# Altium PCB PDM Mk21.PcbDoc
Units mm, origin at the board's own origin, x right, y up, seen from the top; angles counter-clockwise.
Board outline 34 x 73 mm, 4 copper layers (Top Layer, Ground Layer, Power Layer, Bottom Layer), stack 0.778 mm thick; 37 components, 33 nets, 170 pads, 66 vias.
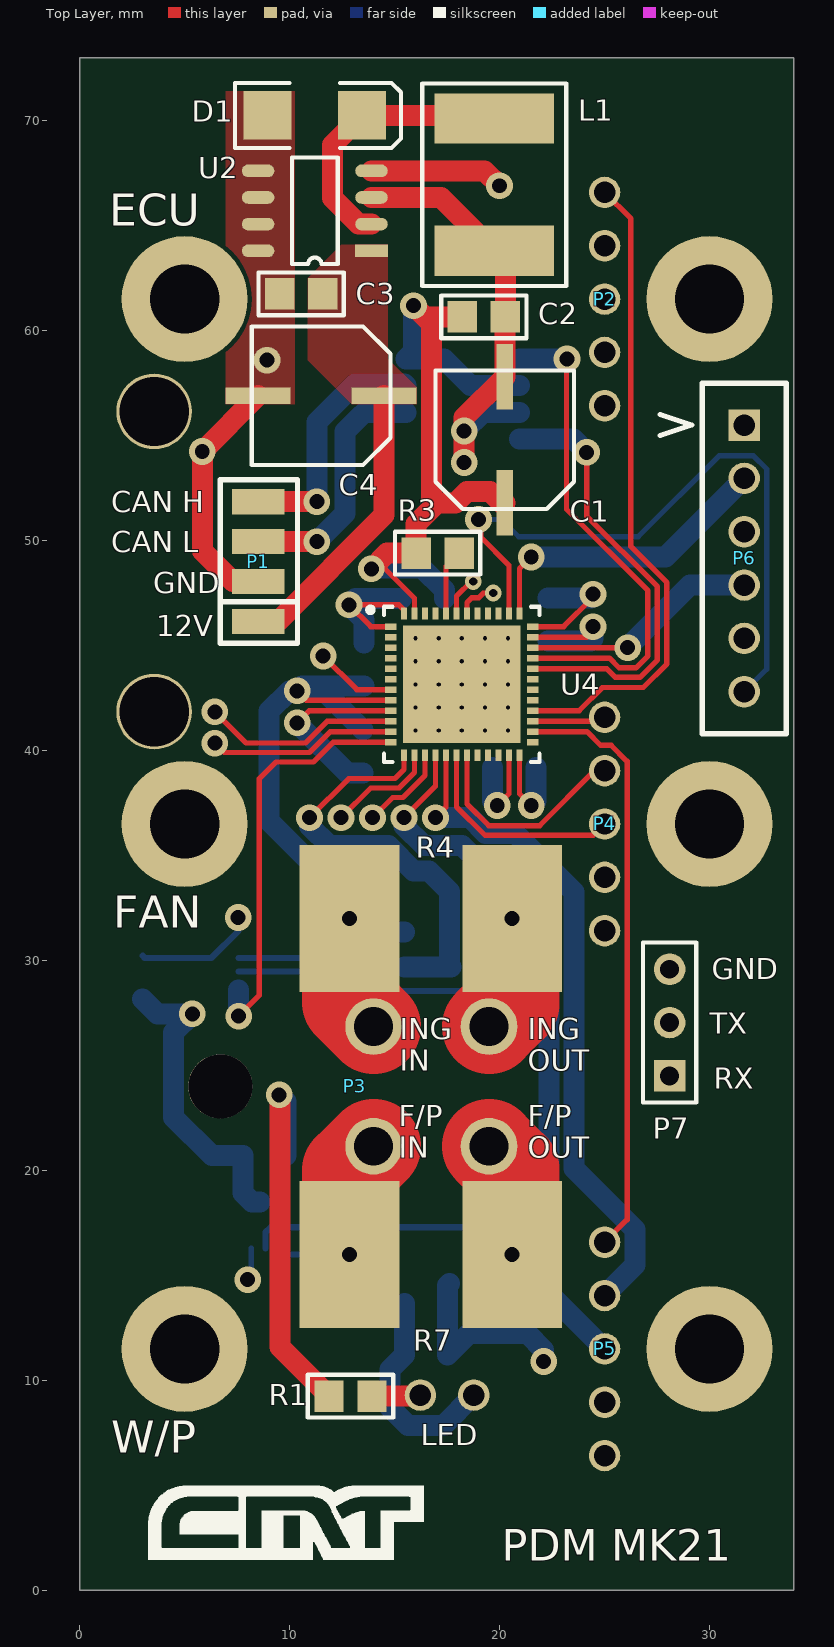
[diagram p0: Top Layer view]
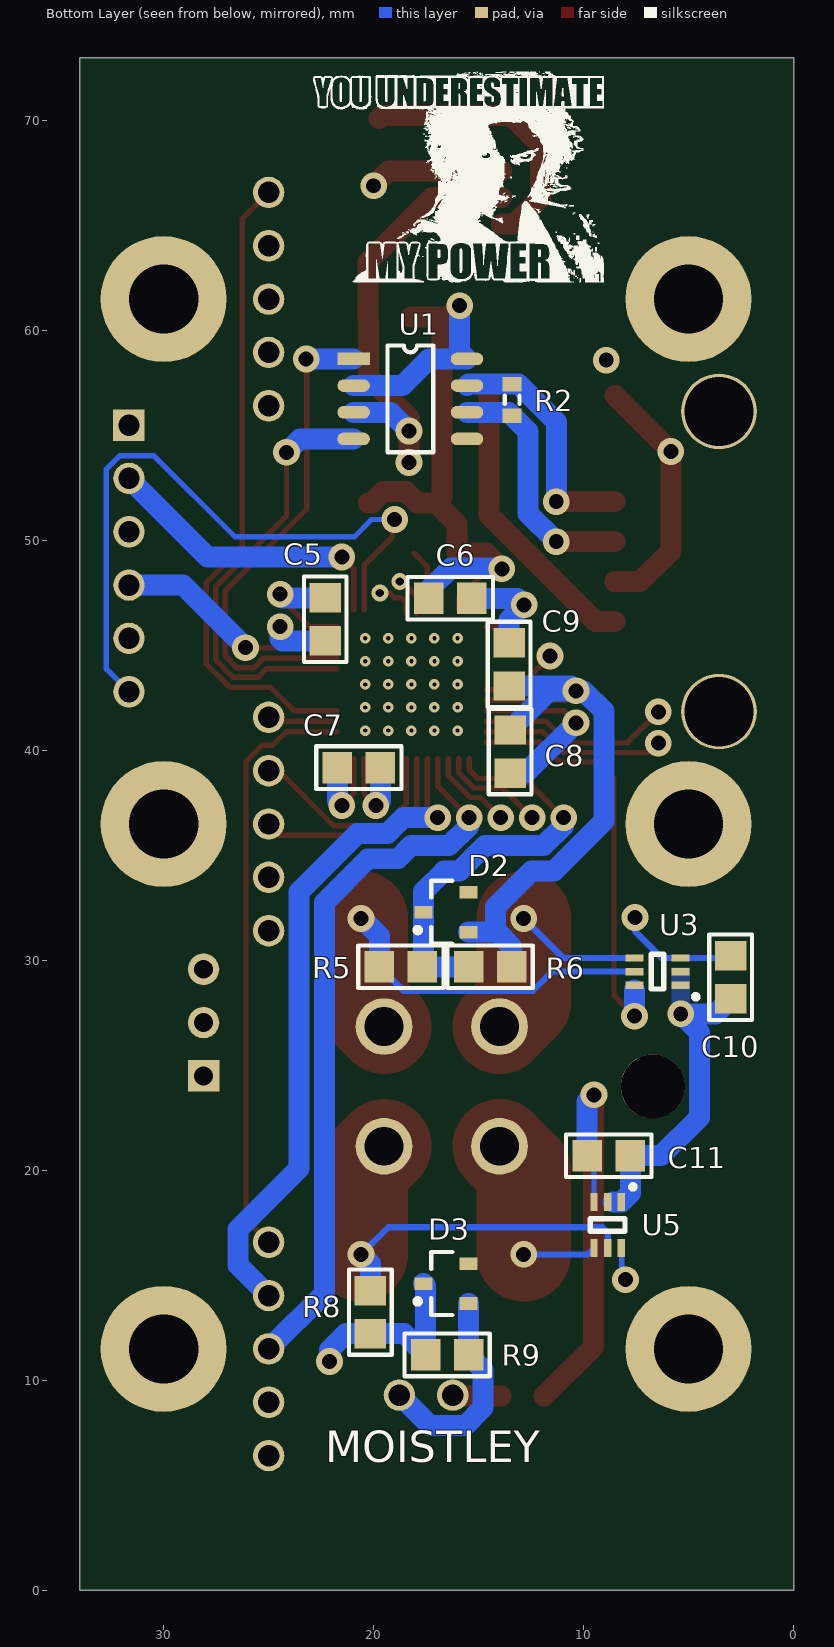
[diagram p1: Bottom Layer view, seen from below]
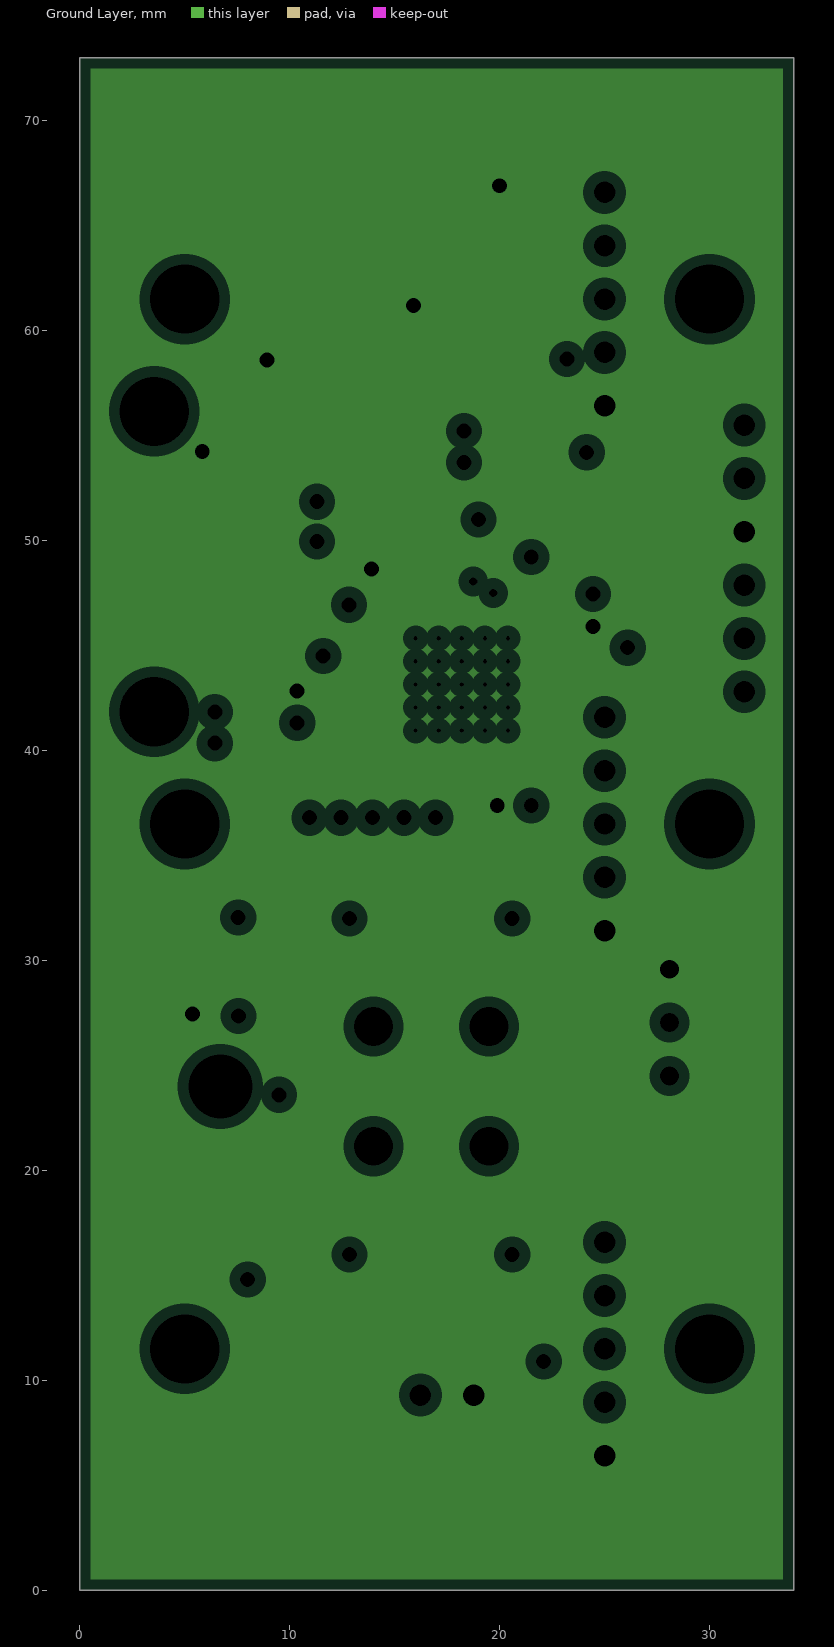
[diagram p2: Ground Layer, clearances drawn from the general rule]
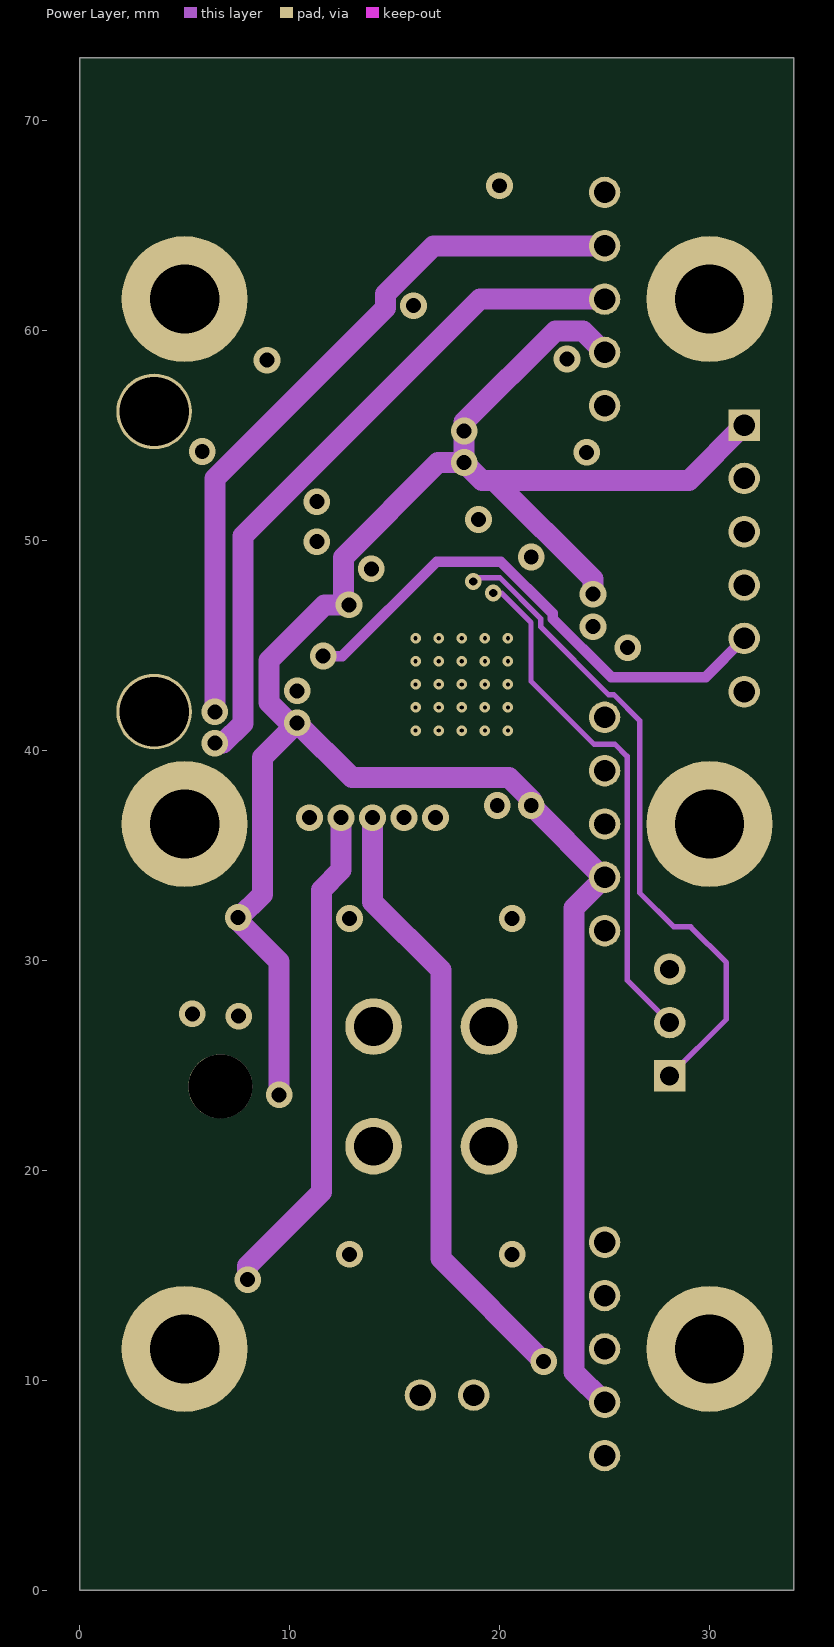
[diagram p3: Power Layer]

## Layer stack, top to bottom
Top Solder: solder mask 0.0102, Solder Resist, Dk 3.5
Top Layer: signal copper 0.0356
Dielectric 1: core 0.254, FR-4, Dk 4.2
Ground Layer: plane copper 0.036, net GND
Dielectric 2: core 0.254, Dk 4.2
Power Layer: signal copper 0.036
Dielectric 3: prepreg 0.127, Dk 4.2
Bottom Layer: signal copper 0.0356
Bottom Solder: solder mask 0.0102, Solder Resist, Dk 3.5

## Board outline
0,0 0,73 34,73 34,0

## Design rules (kind name [scope] priority, off if disabled: settings)
Clearance [All] p1: gap=0.2
ComponentClearance [All] p1: gap=0 collisioncheckmode=3 verticalgap=0 showdistances=FALSE
PlaneClearance [All] p1: clearance=0.508
PlaneConnect [All] p1: planeconnectstyle=Direct reliefexpansion=0.508 reliefentries=4 reliefconductorwidth=0.254 reliefairgap=0.254
PolygonConnect [All] p1: connectstyle=Direct reliefconductorwidth=0.254 reliefentries=4 polygonreliefangle="90 Angle" airgapwidth=0.254
RoutingVias [All] p1: holewidth=0.711 width=1.27 viastyle="Through Hole" minholewidth=0.2 minwidth=0.5 maxholewidth=0.711 maxwidth=1.27
SolderMaskExpansion [All] p1: expansion=0.102
Width [All] p1: maxlimit=4.75 minlimit=0.254 preferedwidth=1.5
27 further rules are at their usual default settings.

## Components (designator, comment, footprint, x,y, rotation, side; value= is the part's Value field where it differs from the comment)
C1 "" "SMD CAPACITOR 220UF 16V" 20.25,54.8 r180 top
C2 "" R0805 19.25,60.65 r0 top
C3 "Cap" R0805 10.55,61.75 r180 top
C4 "" "SMD CAPACITOR 220UF 16V" 11.5,56.9 r270 top
C5 "Cap" R0805 22.3,46.25 r90 bottom
C6 "Cap" R0805 16.35,47.25 r180 bottom
C7 "Cap" R0805 20.7,39.19 r0 bottom
C8 "Cap" R0805 13.5,39.95 r270 bottom
C9 "Cap" R0805 13.55,44.1 r90 bottom
C10 "Cap" R0805 3,29.2 r90 bottom
C11 "Cap" R0805 8.8,20.7 r0 bottom
D1 "D Schottky" Diode 11.2,70.25 r180 top
D2 "3.6v" BZX84CxxxET1G 16.55,32.3 r0 bottom
D3 "3.6v" BZX84CxxxET1G 16.55,14.61 r0 bottom
L1 "47mH" Inductor 19.75,66.95 r90 top
LED "" LED-0 17.5,9.3 r180 top (schematic designator LED1)
P1 "Mega-fit 4 pin connector" "SMD 4Wire" 8.5,49 r0 top
P2 "Board to board 2.5mm jumper pins" "Board-Board Jumper" 25,61.5 r0 top
P3 "Mega-fit 4 pin connector" "Mega-fit 4 pin connector" 6.7,24 r90 top
P4 "Board to board 2.5mm jumper pins" "Board-Board Jumper" 25,36.5 r0 top
P5 "Board to board 2.5mm jumper pins" "Board-Board Jumper" 25,11.5 r0 top
P6 "Programming Pins" "Programming Pins" 31.65,55.5 r0 top
P7 "UART Debug" HDR1X3 28.1,24.5 r90 top
R1 "GND" R0805 12.9,9.25 r0 top
R2 "Res3" J1-0603 13.4,56.7 r90 bottom
R3 "GND" R0805 17.05,49.4 r180 top
R4 "CRS1050 R003" CRS1050 12.85,32 r0 top
R5 "Low Drift" R0805 18.7,29.7 r0 bottom
R6 "Low Drift" R0805 14.45,29.7 r0 bottom
R7 "CRS1050 R003" CRS1050 12.85,16 r0 top
R8 "Low Drift" R0805 20.15,13.25 r90 bottom
R9 "Low Drift" R0805 16.5,11.21 r0 bottom
U1 "CAN Transceiver" "CAN Transceiver" 20.95,58.65 r180 bottom
U2 "DC/DC CONVERTER" "DC/DC Converter" 13.9,63.8 r180 top
U3 "High side current sense amplifier" INA212 5.38,28.82 r90 bottom
U4 "PDM Mk21 MICRO" QFN50P700X700X60_HS-49N 18.2,43.15 r0 top
U5 "High side current sense amplifier" INA212 8.2,18.5 r0 bottom

## Footprints (in the part's own frame and the unit in brackets; to place one, negate y for a bottom-side part, rotate by r counter-clockwise, add the part's x,y. Pads: shape width x height; smd on the part's side, far side on the other; paste and mask are expansions set on the pad)
"Board-Board Jumper" [mm] "Board to board 2.54mm header pins"
  round 1.5 hole 1.02: 1(0,5.08) 2(0,2.54) 3(0,0) 4(0,-2.54) 5(0,-5.08)
BZX84CxxxET1G [mm] "SOT23, 3-Leads, Body 2.9x1.3mm, Pitch 0.95mm, Lead Span 2.3mm - Reverse Pinning, IPC High Density"
  rect 0.85x0.6 smd: 1(-1.075,0.95) 2(1.075,0) 3(-1.075,-0.95)
  silkscreen extent -0.3,-1.5 1.48,1.5, body extent -0.7,-1.5 0.7,1.5, height 1.1
"CAN Transceiver" [mm] "SOP8 Footprint"
  rect 1.55x0.6 smd: 1(0,0)
  oval 1.55x0.6 smd: 2(0,-1.27) 3(0,-2.54) 4(0,-3.81) 5(5.4,-3.81) 6(5.4,-2.54) 7(5.4,-1.27) 8(5.4,0)
  silkscreen extent 1.61,-4.45 3.79,0.63, body extent -0.4,-4.35 5.6,0.55, height 1.62
CRS1050 [mm] "3mOhm current shunt resistor footprint"
  rect 4.75x7 smd: 1(0,0) 2(7.75,0)
  body extent -1.37,-2.5 9.13,2.5, height 0.9
"DC/DC Converter" [mm] "SOP8 footprint"
  rect 1.55x0.6 smd: 1(0,0)
  oval 1.55x0.6 smd: 2(0,-1.27) 3(0,-2.54) 4(0,-3.81) 5(5.4,-3.81) 6(5.4,-2.54) 7(5.4,-1.27) 8(5.4,0)
  silkscreen extent 1.61,-4.44 3.79,0.64, body extent -0.4,-4.35 5.6,0.55, height 1.62
Diode [mm] "DO-214-AA/SMB; 2 C-Bend Leads; Body 5.3 x 3.6 mm, inc. leads (LxW)"
  rect 2.3x2.3 smd: 1(2.25,0) 2(-2.25,0)
  silkscreen extent -4.1,-1.55 3.8,1.55, body extent -2.54,-1.02 2.54,1.02, height 2
HDR1X3 [mm] "Connector; Header; 3 Position"
  rect 1.5x1.5 hole 0.9: 1(0,0)
  round 1.5 hole 0.9: 2(2.54,0) 3(5.08,0)
  silkscreen extent -1.27,-1.27 6.35,1.27
INA212 [mm] "Current Amplifier"
  rect 0.35x0.85 smd: 1(0,0) 2(0.65,0) 3(1.3,0) 4(1.3,2.2) 5(0.65,2.2) 6(0,2.2)
  silkscreen extent -0.65,-0.82 1.48,1.4, body extent -0.42,0.4 1.73,1.8, height 1.1
Inductor [mm]
  rect 2.4x5.7 smd: 1(3.15,0) 2(-3.15,0)
  silkscreen extent -4.83,-3.43 4.83,3.43, body extent -3.15,-3.15 3.15,3.15, height 4.5
J1-0603 [mm] "Chip Resistor, Body 1.6x0.8mm, IPC High Density"
  rect 0.7x0.9 smd: 1(-0.75,0) 2(0.75,0)
  silkscreen extent -0.2,-0.35 0.2,0.35, body extent -0.85,-0.48 0.85,0.48, height 0.9
LED-0 [mm] "LED; 2 Leads"
  round 1.5 hole 1.02: 1(1.27,0) 2(-1.27,0)
"Mega-fit 4 pin connector" [mm] "MOLEX mega-fit 4 pin connector"
  round 3.05 hole 3.05: 0(0,0)
  round 2.7 hole 1.85: 1(2.85,-7.3) 2(2.85,-12.8) 3(-2.85,-12.8) 4(-2.85,-7.3)
  body extent -6.03,-13.36 6.03,8.6, height 15.62
"Programming Pins" [mm] "STM32 Micro Programming Pins"
  rect 1.5x1.5 hole 1.02: 1(0,0)
  round 1.5 hole 1.02: 2(0,-2.54) 3(0,-5.08) 4(0,-7.62) 5(0,-10.16) 6(0,-12.7)
  silkscreen extent -4,-14.7 2,2, body extent -1.27,-13.97 1.27,1.27, height 9.5
QFN50P700X700X60_HS-49N [mm] "QFN, 48-Leads, Body 7.00x7.00mm, Pitch 0.50mm, Thermal Pad 5.80x5.80mm, IPC Medium Density"
  rect 0.55x0.3 smd: 1(-3.375,2.75) 2(-3.375,2.25) 3(-3.375,1.75) 4(-3.375,1.25) 5(-3.375,0.75) 6(-3.375,0.25) 7(-3.375,-0.25) 8(-3.375,-0.75) 9(-3.375,-1.25) 10(-3.375,-1.75) 11(-3.375,-2.25) 12(-3.375,-2.75) 25(3.375,-2.75) 26(3.375,-2.25) 27(3.375,-1.75) 28(3.375,-1.25) 29(3.375,-0.75) 30(3.375,-0.25) 31(3.375,0.25) 32(3.375,0.75) 33(3.375,1.25) 34(3.375,1.75) 35(3.375,2.25) 36(3.375,2.75)
  rect 0.3x0.55 smd: 13(-2.75,-3.375) 14(-2.25,-3.375) 15(-1.75,-3.375) 16(-1.25,-3.375) 17(-0.75,-3.375) 18(-0.25,-3.375) 19(0.25,-3.375) 20(0.75,-3.375) 21(1.25,-3.375) 22(1.75,-3.375) 23(2.25,-3.375) 24(2.75,-3.375) 37(2.75,3.375) 38(2.25,3.375) 39(1.75,3.375) 40(1.25,3.375) 41(0.75,3.375) 42(0.25,3.375) 43(-0.25,3.375) 44(-0.75,3.375) 45(-1.25,3.375) 46(-1.75,3.375) 47(-2.25,3.375) 48(-2.75,3.375)
  rect 5.6x5.6 smd: 49(0,0)
  silkscreen extent -4.47,-3.7 3.7,3.7, body extent -3.55,-3.55 3.55,3.55, height 0.6
R0805 [mm]
  rect 1.4x1.5 smd: 1(-1.025,0) 2(1.025,0)
  silkscreen extent -2.03,-1.02 2.03,1.02, body extent -1.4,-0.76 1.4,0.76, height 1
"SMD 4Wire" [mm]
  rect 2.5x1.2 smd: 1(0,-2.85) 2(0,-0.95) 3(0,0.95) 4(0,2.85)
  silkscreen extent -1.81,-3.89 1.88,3.89
"SMD CAPACITOR 220UF 16V" [mm]
  rect 0.8x3.1 smd: 1(0,3) 2(0,-3)
  silkscreen extent -3.3,-3.3 3.3,3.3, body extent -3,-3 3,3, height 5

## Part data
C1 C2 C4: library part "Cap Semi", "Capacitor (Semiconductor SIM Model)"
C3 C5 C6 C7 C8 C9 C10 C11: "Capacitor"
D1: "Schottky Diode"
D2 D3: library part "D Zener", "Zener Diode"
L1: library part Inductor, "Inductor"
LED: library part LED0, "Typical INFRARED GaAs LED"
P1: "MOLEX mega-fit 4 pin connector"
P2 P4 P5: library part "Board-Board Jumper"
P3: library part "Header 4", "Header, 4-Pin"
P6: "STM32 micro programming pins"
P7: library part "Header 3", "Header, 3-Pin"
R1 R3: library part Res1, "Resistor"
R2: "Resistor"
R4 R7: library part CSR1050, "Current Shunt Resistor"
R5 R6 R8 R9: library part Res2, "Resistor"
U1: library part 595-SN65HVD233D
U2: library part AP1509-33SG-13
U3 U5: library part INA212
U4: library part STM32F072CBU6

## Free pads (board coordinates)
  round 3.6 hole 3.3: 0(3.55,41.85) 0(3.55,56.15)
  round 6 hole 3.3: 0(5,11.5) 0(5,36.5) 0(5,61.5) 0(30,11.5) 0(30,36.5) 0(30,61.5)

## Via types
v1: diameter 1.27, hole 0.711, Top Layer to Bottom Layer, 39 vias
v2: diameter 0.5, hole 0.2, Top Layer to Bottom Layer, 25 vias
v3: diameter 0.8, hole 0.4, Top Layer to Bottom Layer, 2 vias

## Nets (pads, with @x,y where several pads share a name; then routed paths per layer and width w, separated by ;. In a path a pad name is that pad's centre, name@x,y a point inside that pad or via, vN(x,y) a via of type N, cw(c..) or ccw(c..) an arc to the next point about the centre after c; other vN are vias at no path point)
"CAN H": P1.4 R2.2 U1.7 | length 11.6
  Top Layer w1: P1.4 v1(11.3,51.85)
  Bottom Layer w1: v1(11.3,51.85) 11.3,55.64 13.11,57.45 R2.2 15.48,57.45 U1.7
"CAN L": P1.3 R2.1 U1.6 | length 11.9
  Top Layer w1: P1.3 v1(11.3,49.95)
  Bottom Layer w1: v1(11.3,49.95) 12.64,51.29 12.64,55.19 R2.1 13.56,56.11 U1.6
"CAN RX": U1.4 U4.32 | length 21
  Top Layer w0.254: U4.32@21.75,43.9 25.097,43.9 25.513,43.484 26.687,43.484 27.516,44.313 27.516,47.812 24.15,51.178 v1(24.15,54.2)
  Bottom Layer w1: U1.4 23.51,54.84 v1(24.15,54.2)
"CAN TX": U1.1 U4.33 | length 23.8
  Top Layer w0.254: U4.33@21.75,44.4 25.24,44.4 25.702,43.938 26.498,43.938 27.062,44.502 27.062,47.618 23.188,51.492 23.188,58.628 v1(23.21,58.65)
  Bottom Layer w1: U1.1 v1(23.21,58.65)
"ECU CURRENT": P2.2 U4.10 | length 43.9
  Top Layer w0.254: v1(6.44,41.84) 7.922,40.358 10.758,40.358 11.8,41.4 U4.10@14.65,41.4
  Power Layer w1: v1(6.44,41.84) 6.44,52.952 14.565,61.077 14.565,61.743 16.862,64.04 P2.2
"ECU SIG": P2.1 U4.28 | length 30.8
  Top Layer w0.254: U4.28@21.75,41.9 23.797,41.9 24.897,43 26.845,43 27.97,44.125 27.97,48 26.25,49.72 26.25,65.33 P2.1
"ECU VOLTAGE": P2.3 U4.11 | length 41.4
  Top Layer w0.254: v1(6.44,40.35) 6.886,39.904 10.947,39.904 11.943,40.9 U4.11@14.65,40.9
  Power Layer w1: v1(6.44,40.35) 6.838,40.35 7.775,41.287 7.775,50.213 19.062,61.5 P2.3
"F/P ANV12": P3.3 R7.2 R8.2 U5.5 | length 20.7
  Top Layer w4.5: P3.3 20.6,20.05 v1(20.6,16)
  Bottom Layer w0.3: U5.5 8.85,17.05 9.1,17.3 19.3,17.3 v1(20.6,16)
  Bottom Layer w1: R8.2 20.15,15.55 v1(20.6,16)
"F/P CURRENT": U4.14 U5.6 | length 30.6
  Top Layer w0.254: v1(12.45,36.8) 13.866,38.216 15.216,38.216 15.95,38.95 U4.14@15.95,39.6
  Power Layer w1: v1(8,14.8) 8,15.45 11.515,18.965 11.515,33.365 12.45,34.3 v1(12.45,36.8)
  Bottom Layer w0.254: v1(8,14.8) 8.16,14.8 8.18,14.82 U5.6@8.18,16.3
"F/P IN": P3.4 R7.1 U5.4 | length 9.1
  Top Layer w4.5: v1(12.85,16) 12.85,20 P3.4
  Bottom Layer w0.3: U5.4 9.8,16 v1(12.85,16)
"F/P VOLTAGE": D3.2 R8.1 R9.2 U4.15 | length 42.7
  Top Layer w0.254: v1(13.95,36.8) 14.912,37.762 15.404,37.762 16.45,38.808 U4.15@16.45,39.6
  Power Layer w1: v1(13.95,36.8) 13.95,32.788 17.2,29.538 17.2,15.8 v1(22.1,10.9)
  Bottom Layer w1: D3.2 17.525,14.51 R9.2 18.54,12.225 R8.1 21.325,12.225 22.1,11.45 v1(22.1,10.9)
"FAN CURRENT": P4.2 U4.19 | length 10.2
  Top Layer w0.254: U4.19@18.45,39.6 18.45,37.46 19.492,36.418 21.908,36.418 24.53,39.04 P4.2
"FAN SIG": P4.1 U4.27 | length 3.3
  Top Layer w0.254: U4.27@21.75,41.4 24.82,41.4 P4.1
"FAN VOLTAGE": P4.3 U4.18 | length 10.1
  Top Layer w0.254: U4.18@17.95,39.6 17.95,37.317 19.303,35.964 24.464,35.964 P4.3
GND: C1.1 C2.1 C3.2 C4.2 C5.1 C6.1 C7.1 C8.1 C9.1 C10.1 C11.1 D1.1 D2.1 D3.1 LED.2 P1.2 P2.5 P4.5 P5.5 P6.3 P7.3 R3.2 R6.1 R9.1 U1.2 U1.8 U2.4 U2.5 U2.6 U2.7 U2.8 U3.1 U3.2 U4.8 U4.23 U4.35 U4.47 U5.1 U5.2 | length 119.4
  Top Layer w0.254: v1(10.36,42.84) 10.8,42.4 U4.8@14.65,42.4 ; v1(13.89,48.65) 14.554,48.65 15.95,47.254 U4.47@15.95,46.7 ; v1(19.89,37.38) 20.45,37.94 U4.23@20.45,39.6 ; U4.35@21.75,45.4 24.15,45.4 24.45,45.7 v1(24.45,45.9)
  Top Layer w1: P1.2 7.3,48.05 5.84,49.51 v1(5.84,54.24) C4.2 ; v1(13.89,48.65) 14.64,49.4 R3.2 ; U2.4 19.29,67.61 v1(20,66.9) ; v1(15.9,61.19) 16.44,60.65 ; R3.2@16.025,50 16.025,50.8 17.025,51.8 ; C2.1 16.44,60.65 ; C1.1 20.088,51.8 19.553,52.335 18.447,52.335 17.912,51.8 17.025,51.8 ; 16.44,60.65 16.75,60.34 16.75,52.075 17.025,51.8
  Bottom Layer w1: C10.1 3.715,27.46 v1(5.37,27.46) 4.475,26.565 4.475,22.525 6.3,20.7 C11.1 7.775,18.925 U5.1 8.6,18.5 ; R6.1 13.425,30.675 14.1,31.35 ; C8.1 11.635,42.84 v1(10.36,42.84) ; C9.1 10.595,43.075 v1(10.36,42.84) ; v1(13.89,48.65) 13.94,48.7 16.315,48.7 17.375,47.64 C6.1 ; D3.1 R9.1 14.78,10.515 14.78,8.699 15.629,7.85 17.32,7.85 LED.2 ; D2.1 14.1,31.35 ; v1(15.9,61.19) 15.9,59 U1.8 17.35,58.65 18.62,57.38 U1.2 ; C7.1 19.675,37.595 v1(19.89,37.38) ; C5.1 24.35,45.225 24.45,45.325 v1(24.45,45.9) ; v1(10.36,42.84) 9.992,42.84 9.025,41.873 9.025,36.64 11.4,34.265 12.473,34.265 14.185,32.553 14.185,31.435 14.1,31.35
  other v1: 8.92,58.59
"IGN/INJ IN": P3.1 R4.1 U3.4 | length 11.7
  Top Layer w4.5: v1(12.85,32) 12.85,28 P3.1
  Bottom Layer w0.3: U3.4 10.97,30.12 v1(12.85,32)
"ING/INJ ANV12": P3.2 R4.2 R5.2 U3.5 | length 21.4
  Top Layer w4.5: P3.2 20.6,27.95 v1(20.6,32)
  Bottom Layer w0.3: U3.5 11.505,29.47 12.425,28.55 18.575,28.55 R5.2
  Bottom Layer w1: R5.2 19.725,31.175 v1@20.65,32.1
"ING/INJ CURRENT": U3.6 U4.12 | length 19.8
  Top Layer w0.254: v1(7.57,27.35) 8.55,28.33 8.55,38.65 9.35,39.45 11.135,39.45 12.085,40.4 U4.12@14.65,40.4
  Bottom Layer w1: v1(7.57,27.35) 7.57,28.585
"ING/INJ VOLTAGE": D2.2 R5.1 R6.2 U4.13 | length 20.1
  Top Layer w0.254: v1(10.95,36.8) 12.82,38.67 15.02,38.67 15.45,39.1 U4.13@15.45,39.6
  Bottom Layer w1: v1(10.95,36.8) 10.95,36.412 11.897,35.465 14.7,35.465 15.9,34.265 16.635,34.265 17.625,33.275 D2.2 17.625,29.75 R5.1 R6.2
NetD1_2: D1.2 L1.1 U2.2 | length 13.3
  Top Layer w1: U2.2 13.281,65.07 12.04,66.311 12.04,68.84 D1.2 19.6,70.25 L1.1
NetLED_1: LED.1 R1.2 | length 2.3
  Top Layer w1: R1.2 16.18,9.25 LED.1
NetR3_1: R3.1 U4.44 | length 3
  Top Layer w0.254: U4.44@17.45,46.7 17.45,48.775 R3.1
NRST: P6.5 U4.7 | length 28.8
  Top Layer w0.254: v1(11.6,44.5) 13.2,42.9 U4.7@14.65,42.9
  Power Layer w0.5: v1(11.6,44.5) 12.5,44.5 17,49 20.058,49 22.531,46.527 22.531,46.285 25.316,43.5 29.81,43.5 P6.5
SWCLK: P6.2 U4.37 | length 14.7
  Top Layer w0.254: U4.37@20.95,46.7 20.95,48.66 v1(21.51,49.22)
  Bottom Layer w0.254: v1(21.51,49.22) v1@21.7,49.41
  Bottom Layer w1: v1(21.51,49.22) 27.91,49.22 P6.2
SWDIO: P6.4 U4.34 | length 11.1
  Top Layer w0.254: U4.34@21.75,44.9 v1(26.1,44.9)
  Bottom Layer w1: v1(26.1,44.9) 29.08,47.88 P6.4
SWO: P6.6 U4.38 | length 31.9
  Top Layer w0.254: v1(19,51) 19.102,50.898 19.102,50.168 20.45,48.82 U4.38@20.45,46.7
  Bottom Layer w0.254: v1(19,51) 20.094,51 20.912,50.182 26.602,50.182 30.457,54.037 32.096,54.037 32.727,53.406 32.727,43.877 P6.6
"UART RX": P7.1 U4.43 | length 33.2
  Top Layer w0.254: U4.43 17.95,47.35 18.65,48.05 v3(18.75,48.05)
  Power Layer w0.254: v3(18.75,48.05) 18.927,48.227 20.015,48.227 21.954,46.288 21.954,45.9 25.197,42.657 25.446,42.657 26.673,41.43 26.673,33.227 28.3,31.6 29.1,31.6 30.8,29.9 30.8,27.2 P7.1
"UART TX": P7.2 U4.42 | length 26.7
  Top Layer w0.254: U4.42 18.45,47.05 18.673,47.273 19.001,47.273 19.228,47.5 v3(19.7,47.5)
  Power Layer w0.254: v3(19.7,47.5) 20.1,47.5 21.5,46.1 21.5,43.3 24.5,40.3 25.5,40.3 26.077,39.723 26.077,29.063 P7.2
"VCC 3V3": C1.2 C2.2 C5.2 C6.2 C7.2 C8.2 C9.2 C10.2 C11.2 L1.2 P2.4 P4.4 P5.4 P6.1 R1.1 U1.3 U2.3 U3.3 U4.1 U4.9 U4.24 U4.36 U4.48 U5.3 | length 191.3
  Top Layer w0.254: v1(10.36,41.32) 10.94,41.9 U4.9@14.65,41.9 ; U4.1@14.65,45.9 13.87,45.9 v1(12.83,46.94) 15.21,46.94 U4.48@15.45,46.7 ; U4.24@20.95,39.6 20.95,37.94 v1(21.51,37.38) ; U4.36@21.75,45.9 23.05,45.9 24.45,47.3 v1(24.45,47.45)
  Top Layer w1: v1@9.535,23.6 9.535,11.59 R1.1 ; U2.3 17.21,66.34 L1.2 20.275,63.275 C2.2 20.25,60.625 C1.2 18.31,55.86 v1(18.31,55.22) v1(18.31,53.72)
  Power Layer w1: v1(7.55,32.05) v1@7.55,32 ; v1(9.5,23.6) 9.5,29.95 7.5,31.95 v1@7.55,32 ; v1(24.45,47.45) 24.45,48.168 19.77,52.848 19.77,52.865 ; P5.4 23.55,10.41 23.55,32.51 P4.4 24.93,33.96 v1(21.51,37.38) 21.51,37.648 20.443,38.715 12.965,38.715 v1(10.36,41.32) ; P2.4 23.975,59.985 22.657,59.985 18.31,55.638 v1(18.31,55.22) v1(18.31,53.72) ; P6.1 29.015,52.865 19.77,52.865 ; v1@7.55,32 8.7,33.15 8.7,39.66 v1(10.36,41.32) ; v1(10.36,41.32) 9.992,41.32 9.025,42.287 9.025,44.293 11.672,46.94 v1(12.83,46.94) 12.555,47.215 12.555,49.203 17.072,53.72 v1(18.31,53.72) ; v1(18.31,53.72) 19.165,52.865 19.77,52.865
  Bottom Layer w0.254: U5.3 9.5,20.375 C11.2
  Bottom Layer w0.3: C10.2 3.105,30.12 U3.3 6.27,30.12 7.55,31.4 v1(7.55,32.05)
  Bottom Layer w1: v1(9.5,23.6) 9.825,23.275 C11.2 ; v1(10.36,41.32) 12.755,38.925 C8.2 ; C9.2 13.55,46.22 v1(12.83,46.94) 13.14,47.25 C6.2 ; v1(18.31,55.22) 19.2,56.11 U1.3 ; v1(21.51,37.38) 21.725,37.595 C7.2 ; C5.2 24.35,47.275 24.45,47.375 v1(24.45,47.45)
"VCC 12V": C3.1 C4.1 P1.1 U2.1 | length 13.8
  Top Layer w1: P1.1 9.44,46.15 14.5,51.21 C4.1
"W/P CURRENT": P5.2 U4.17 | length 32.1
  Top Layer w0.254: v1(16.95,36.8) 17.45,37.3 U4.17@17.45,39.6
  Bottom Layer w1: v1(16.95,36.8) 18.582,36.8 19.337,36.045 20.755,36.045 23.55,33.25 23.55,20.081 26.45,17.181 26.45,15.49 P5.2
"W/P SIG": P5.1 U4.26 | length 28.3
  Top Layer w0.254: U4.26@21.75,40.9 24.157,40.9 24.807,40.25 25.313,40.25 26.077,39.486 26.077,17.657 P5.1
"W/P VOLTAGE": P5.3 U4.16 | length 34.6
  Top Layer w0.254: v1(15.45,36.8) 16.95,38.3 U4.16@16.95,39.6
  Bottom Layer w1: v1(15.45,36.8) 15.45,36.412 16.397,35.465 18.22,35.465 18.84,34.845 20.258,34.845 22.35,32.753 22.35,14.15 P5.3
pads on no net: D2.3 D3.3 P3.0 U1.5 U4.2 U4.3 U4.4 U4.5 U4.6 U4.20 U4.21 U4.22 U4.25 U4.29 U4.30 U4.31 U4.39 U4.40 U4.41 U4.45 U4.46 U4.49
copper on no net:
  other v2: 16,40.95 17.1,40.95 18.2,40.95 19.3,40.95 20.4,40.95 16,42.05 17.1,42.05 18.2,42.05 19.3,42.05 20.4,42.05 16,43.15 17.1,43.15 18.2,43.15 19.3,43.15 20.4,43.15 16,44.25 17.1,44.25 18.2,44.25 19.3,44.25 20.4,44.25 16,45.35 17.1,45.35 18.2,45.35 19.3,45.35 20.4,45.35

## Polygon pours and split planes (outlines as drawn)
GND on Bottom Layer "GND_L04_P062" (solid, pour order 62): 4.95,27.5 5.81,27.5 5.81,29.65 4.95,29.65
GND on Top Layer "NONET_L-01_P-001" (solid, pour order 68): 10.25,71.4 6.95,71.4 6.95,68.45 6.95,64.2 6.95,58.35 6.95,56.5 10.25,56.5
"VCC 12V" on Top Layer "NONET_L-01_P-001" (solid, pour order 70): 14.68,64.1 13.12,64.1 12.47,64.1 10.87,62.5 10.87,58.59 12.96,56.5 16.05,56.5 16.05,57.3 14.68,58.67
GND on Ground Layer (split plane): 33.49,0.51 0.51,0.51 0.51,72.49 33.49,72.49

## Silkscreen, mask and mechanical layers (free items; w line width, h text height)
Top Overlay:
  region: 512 vertices and 4 holes, not listed, extent 3.273,1.468 16.379,4.989
  text "ECU" at 1.4,65 h1.52
  text "CAN H" at 1.5,51.35 h1
  text "CAN L" at 1.5,49.45 h1
  text "GND" at 3.5,47.5 h1
  text "12V" at 3.65,45.45 h1
  text "FAN" at 1.6,31.55 h1.52
  text "GND" at 30.1,29.1 h1
  text "TX" at 30,26.5 h1
  text "ING / IN" at 15.25,24.75 h1
  text "ING / OUT" at 21.35,24.75 h1
  text "RX" at 30.2,23.9 h1
  text "F/P / IN" at 15.2,20.6 h1
  text "F/P / OUT" at 21.35,20.6 h1
  text "W/P" at 1.5,6.55 h1.52
  text "PDM MK21" at 20.1,1.4 h1.5
Bottom Overlay:
  drawing of 4863 lines, arcs and shapes, not listed
  text "MOISTLEY" at 22.3,6.1 h1.5